# Altium PCB SkayboardRev2.PcbDoc
Units mm, origin at the board's own origin, x right, y up, seen from the top; angles counter-clockwise.
Board outline 356.9 x 107.25 mm, 2 copper layers (Top Layer, Bottom Layer); 3 components, 0 nets, 21 pads, 0 vias.
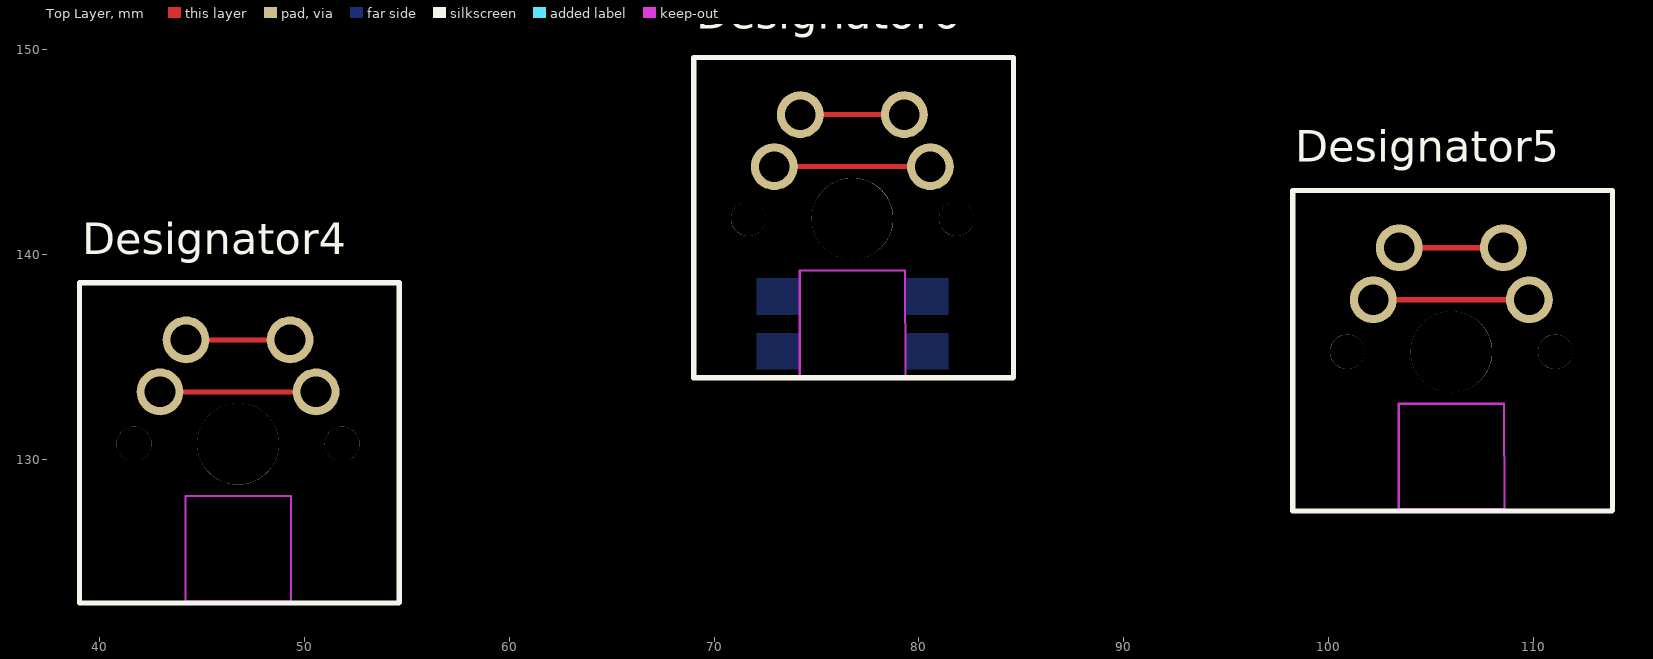
[diagram p0: Top Layer view]
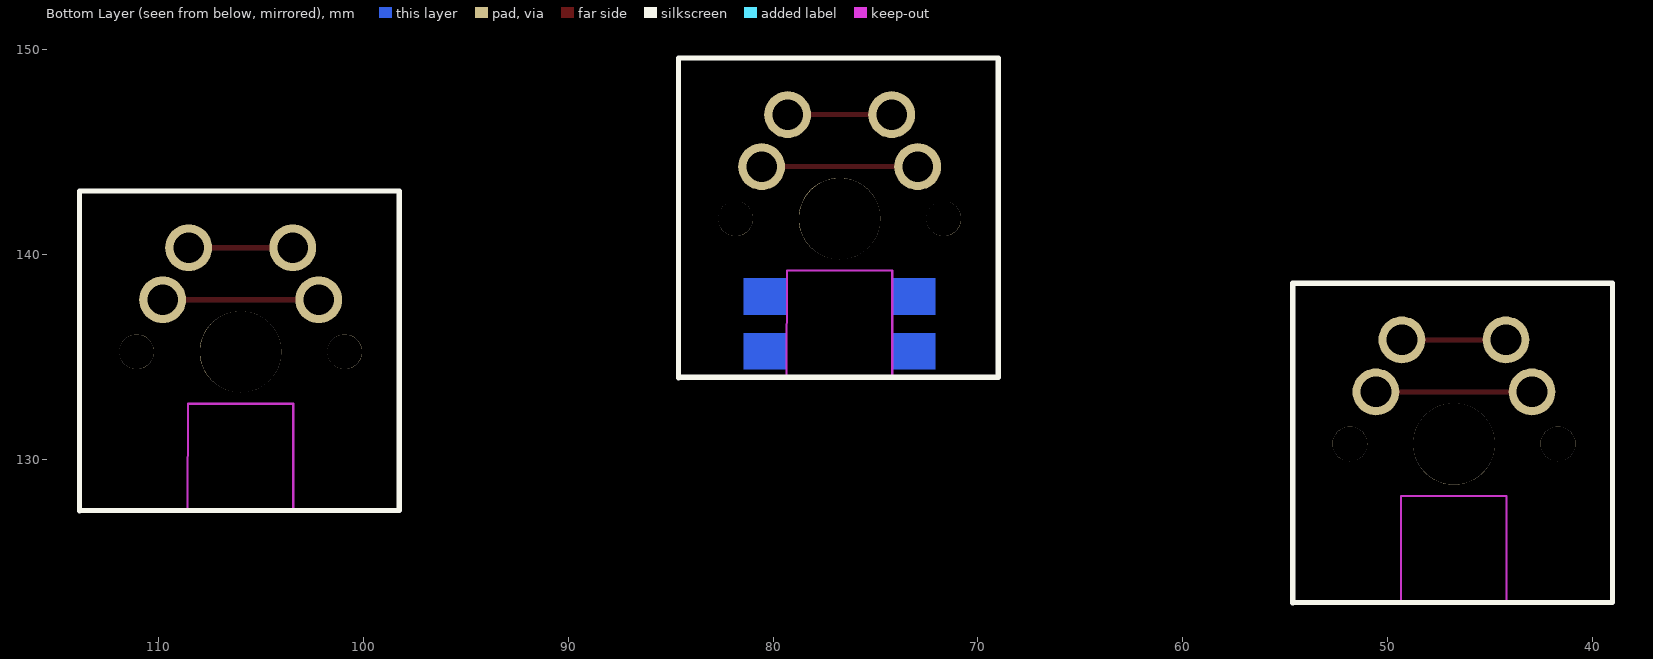
[diagram p1: Bottom Layer view, seen from below]

## Layer stack, top to bottom
Top Solder: solder mask 0.0102, Solder Resist, Dk 3.5
Top Layer: signal copper 0.0356
Dielectric 1: dielectric 0.32, FR-4, Dk 4.8
Bottom Layer: signal copper 0.0356
Bottom Solder: solder mask 0.0102, Solder Resist, Dk 3.5

## Board outline
1.085,5.462 0.757,6.174 0.484,6.91 0.272,7.667 0.119,8.437 0.025,9.217 -0.005,10.001 -0.005,97.252 0.025,98.037 0.119,98.817 0.272,99.586 0.484,100.343 0.757,101.078 1.085,101.792 1.468,102.477 1.905,103.129 2.39,103.746 2.923,104.324 3.501,104.857 4.118,105.342 4.77,105.779 5.455,106.162 6.169,106.49 6.905,106.763 7.661,106.975 8.43,107.128 9.21,107.222 9.995,107.252 346.897,107.252 347.681,107.222 348.461,107.128 349.23,106.975 349.986,106.763 350.722,106.49 351.436,106.162 352.121,105.779 352.773,105.342 353.39,104.857 353.969,104.324 354.502,103.746 354.985,103.129 355.422,102.477 355.807,101.792 356.135,101.078 356.407,100.343 356.618,99.586 356.774,98.817 356.865,98.037 356.897,97.252 356.897,10.001 356.865,9.217 356.774,8.437 356.618,7.667 356.407,6.91 356.135,6.174 355.807,5.462 355.422,4.777 354.985,4.124 354.502,3.507 353.969,2.929 353.39,2.397 352.773,1.911 352.121,1.475 351.436,1.091 350.722,0.763 349.986,0.491 349.23,0.278 348.461,0.125 347.681,0.031 346.897,0.001 9.995,0.002 9.21,0.031 8.43,0.125 7.661,0.278 6.905,0.491 6.169,0.763 5.455,1.091 4.77,1.475 4.118,1.911 3.501,2.397 2.923,2.929 2.39,3.507 1.905,4.124 1.468,4.777

## Design rules (kind name [scope] priority, off if disabled: settings)
Clearance [All] p1: gap=0.254 ignorepadtopadclearanceinfootprint=FALSE except(0: Arc-Hole Track-Hole SMDPad-Hole THPad-Hole Via-Hole Fill-Hole Poly-Hole Region-Hole Text-Hole)
PolygonConnect [All] p1: connectstyle=Relief reliefconductorwidth=0.254 reliefentries=4 polygonreliefangle="90 Angle" airgapwidth=0.254
RoutingVias [All] p1: holewidth=0.711 width=1.27 viastyle="Through Hole" minholewidth=0.711 minwidth=1.27 maxholewidth=0.711 maxwidth=1.27
SolderMaskExpansion [All] p1: expansion=0.102 istentingtop=FALSE
Width [All] p1: maxlimit=0.254 minlimit=0.254 preferedwidth=0.254
30 further rules are at their usual default settings.

## Components (designator, comment, footprint, x,y, rotation, side; value= is the part's Value field where it differs from the comment)
Designator4 "Comment" Skey-Footprint-1#1 46.75,130.75 r0 top
Designator5 "Comment" Skey-Footprint-1#1 106,135.25 r0 top
Designator6 "Comment" Skey-Footprint-1#2 76.75,141.75 r0 top

## Footprints (in the part's own frame and the unit in brackets; to place one, negate y for a bottom-side part, rotate by r counter-clockwise, add the part's x,y. Pads: shape width x height; smd on the part's side, far side on the other; paste and mask are expansions set on the pad)
Skey-Footprint-1#1 [mil]
  round 90 hole 59: 1(-150,100) 1(150,100) 2(-100,200) 2(100,200)
  round 67 hole 67 unplated: ""(-200,0) ""(200,0)
  round 157 hole 157 unplated: ""(0,0)
  Top Layer lines w10: -160.62,110.62 -150,100 150,100 ; -100,200 100,200
  Keep-Out Layer lines w3.94: -101.38,-100 101.38,-100 ; -101.18,-100 -101.18,-302.76 101.57,-302.76 ; 101.57,-100 101.97,-302.76
  silkscreen extent -305,-306 310,310
Skey-Footprint-1#2 [mil]
  round 90 hole 59: 1(-150,100) 1(150,100) 2(-100,200) 2(100,200)
  round 67 hole 67 unplated: ""(-200,0) ""(200,0)
  round 157 hole 157 unplated: ""(0,0)
  Top Layer lines w10: -160.62,110.62 -150,100 150,100 ; -100,200 100,200
  Bottom Layer region: 103.95,-220 183.95,-220 183.95,-290 103.95,-290
  Bottom Layer region: 103.95,-115 183.95,-115 183.95,-185 103.95,-185
  Bottom Layer region: -183.56,-115 -103.56,-115 -103.56,-185 -183.56,-185
  Bottom Layer region: -183.56,-220 -103.56,-220 -103.56,-290 -183.56,-290
  Keep-Out Layer lines w3.94: -101.38,-100 101.38,-100 ; -101.18,-100 -101.18,-302.76 101.58,-302.76 ; 101.57,-100 101.97,-302.76
  silkscreen extent -305,-306 310,310

## Nets (pads, with @x,y where several pads share a name; then routed paths per layer and width w, separated by ;. In a path a pad name is that pad's centre, name@x,y a point inside that pad or via, vN(x,y) a via of type N, cw(c..) or ccw(c..) an arc to the next point about the centre after c; other vN are vias at no path point)
pads on no net: Designator4. Designator4.1 Designator4.2 Designator5. Designator5.1 Designator5.2 Designator6. Designator6.1 Designator6.2

## Silkscreen, mask and mechanical layers (free items; w line width, h text height)
Mechanical 1:
  drawing of 1764 lines, arcs and shapes, not listed